# EAGLE board Main (EAGLE 8.4.1)
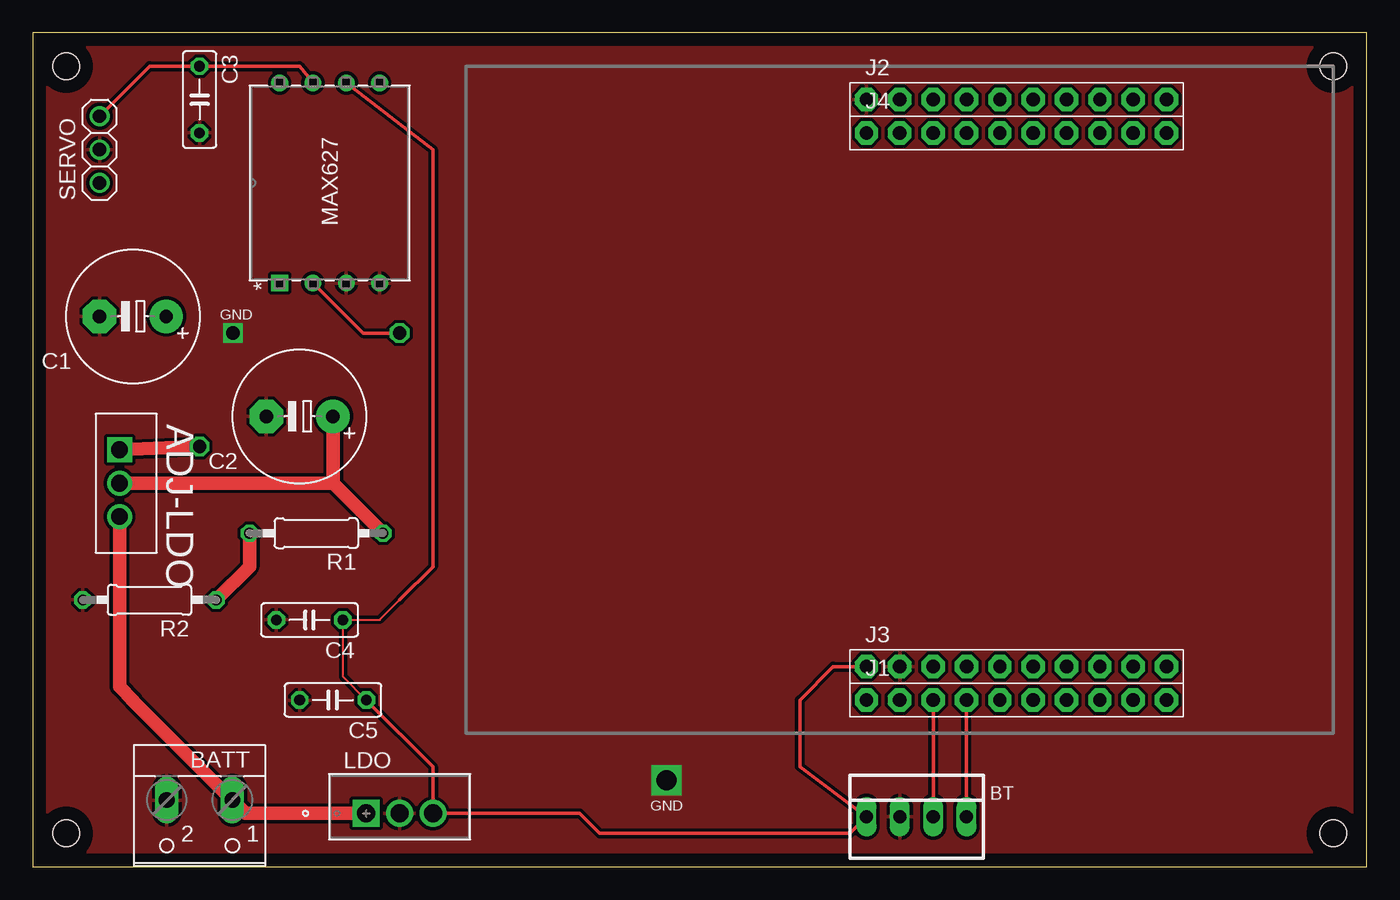
[diagram p0: board, top side]
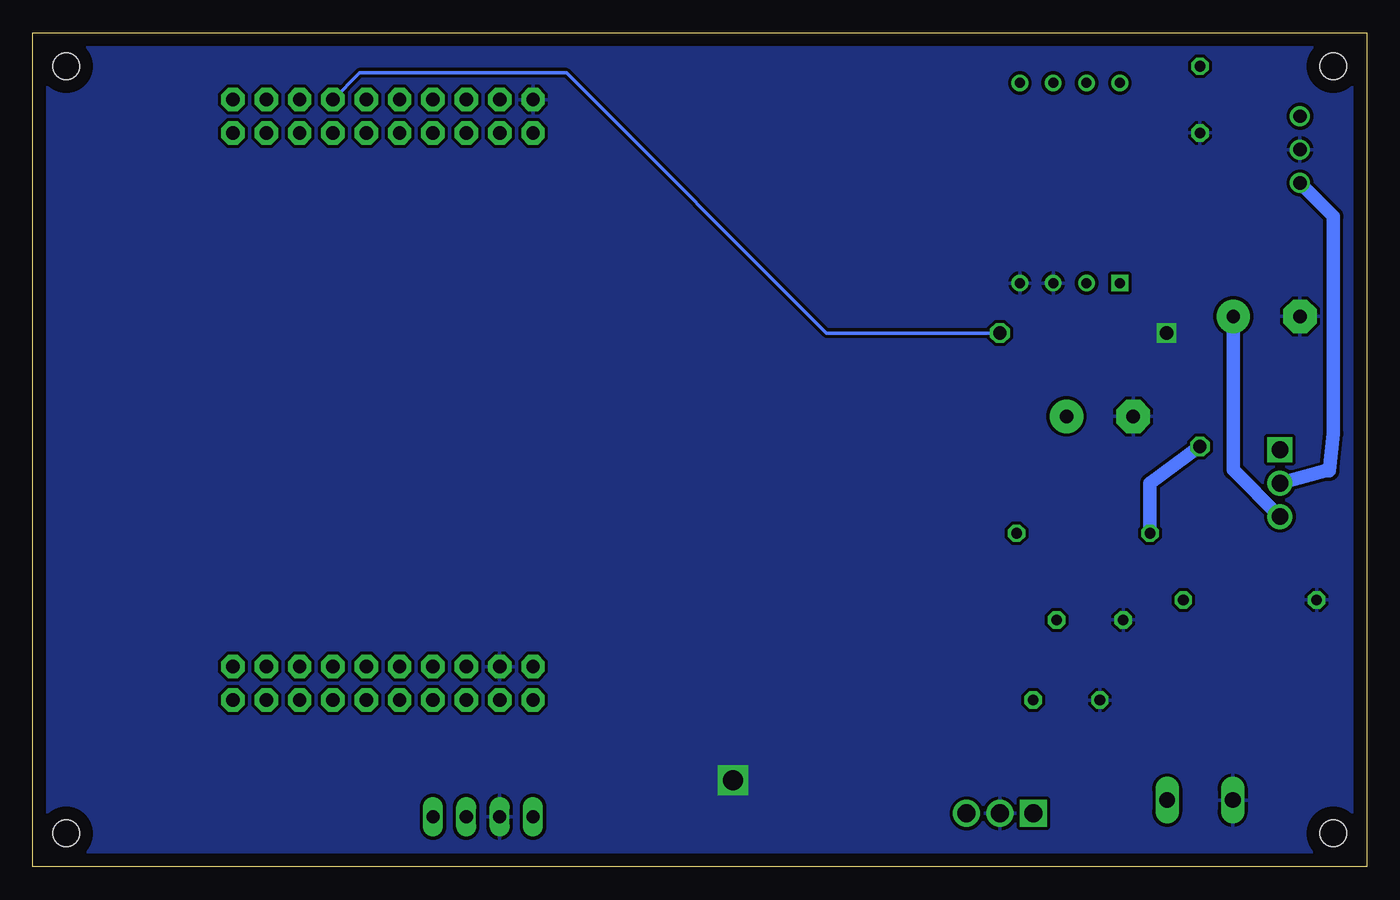
[diagram p1: board, bottom side, seen from below]

Size 101.6 x 63.5 mm. Coordinates in mm from the lower left corner, seen from the top.
Outline: 0,0 101.6,0 101.6,63.5 0,63.5 0,0
Copper layers (1*16): Top 0.035mm / dielectric 1.5mm / Bottom 0.035mm
Design rules "default *": minimum track width 6mil, minimum drill 0.35mm, track to track 10mil, track to pad 10mil, pad to pad 10mil, via to via 10mil, smd to smd 6mil, copper to edge 40mil, drill to drill 6mil, minimum pad ring 10mil, minimum via ring 8mil, stop-mask expansion 4mil, vias tented up to drill 0mil, thermal gap 10mil
Holes 2.03 mm at 2.54,60.96 2.54,2.54 99.06,2.54 99.06,60.96

## Footprints (pad centres in the part's own frame; a part is rotated, then mirrored left to right if it is on the bottom)
TO254P470X1016X2222-3P = drill 1.27 square: 1 -5.08,-1.016 | drill 1.27: 2 -2.54,-1.016; 3 0,-1.016
W237-102 = drill 1.194 long: 1 -2.5,-1.27; 2 2.5,-1.27
22-23-2041 = drill 1 long: 1 -3.81,0; 2 -1.27,0; 3 1.27,0; 4 3.81,0
E5-10,5 = drill 1.016 pad 2.54: + -2.54,0 | drill 1.016 pad 2.54 octagon: - 2.54,0
C050-025X075 = drill 0.813 octagon: 1 -2.54,0; 2 2.54,0
1X10-BIG = drill 1.016 pad 1.778 octagon: 1 -11.43,0; 2 -8.89,0; 3 -6.35,0; 4 -3.81,0; 5 -1.27,0; 6 1.27,0; 7 3.81,0; 8 6.35,0; 9 8.89,0; 10 11.43,0
T03B = drill 1.372 pad 1.88 square: 1 -5.08,-1.016 | drill 1.372 pad 1.88: 2 -2.54,-1.016; 3 0,-1.016
21-0044B_8 = drill 0.762 pad 1.27 square: 1 -15.24,7.62 | drill 0.762 pad 1.27: 2 -15.24,5.08; 3 -15.24,2.54; 4 -15.24,0; 5 0,0; 6 0,2.54; 7 0,5.08; 8 0,7.62
0207/10 = drill 0.813 octagon: 1 -5.08,0; 2 5.08,0
1X03 = drill 1.016: 1 -2.54,0; 2 0,0; 3 2.54,0

## Placement (x,y rotation side)
ADJ-LDO  LM1086  [TO254P470X1016X2222-3P]  7.62,26.67 270 top
BATT  [W237-102]  12.7,3.81 180 top
BT  [22-23-2041]  67.31,3.81 0 top
C1  10uF  [E5-10,5]  7.62,41.91 180 top
C2  10uF  [E5-10,5]  20.32,34.29 180 top
C3  1000pF  [C050-025X075]  12.7,58.42 270 top
C4  4.7uF  [C050-025X075]  21.08,18.8 180 top
C5  0.1uF  [C050-025X075]  22.86,12.7 180 top
J1  PINHD-1X10  [1X10-BIG]  74.93,12.7 0 top
J2  PINHD-1X10  [1X10-BIG]  74.93,58.42 0 top
J3  PINHD-1X10  [1X10-BIG]  74.93,15.24 0 top
J4  PINHD-1X10  [1X10-BIG]  74.93,55.88 0 top
LDO  LM2940T-5.0/NOPB  [T03B]  30.48,5.08 0 top
MAX627  MAX627CPA  [21-0044B_8]  26.42,59.69 90 top
R1  150  [0207/10]  21.59,25.4 180 top
R2  560  [0207/10]  8.89,20.32 180 top
SERVO  [1X03]  5.08,54.61 90 top

## Library data of the parts
ADJ-LDO = LM1086CT-ADJ_NOPB; AVAILABILITY: Good; DESCRIPTION: Ic, Lm1086ct-Adj/Nopb, 1.5a Posi Tive Low Dropout Reg &lt;Az; MF: Texas Instruments; MP: LM1086CT-ADJ/NOPB; PACKAGE: TO-220 Texas Instruments; PRICE: 1.24 USD
BATT = con-wago-500; MPN: 237-102; OC_FARNELL: unknown; OC_NEWARK: 70K9898
BT = con-molex; MF: MOLEX; MPN: 22-23-2041; OC_FARNELL: 1462920; OC_NEWARK: 38C0355
C1-C5 R1 R2 = rcl
J1-J4 SERVO = adafruit
LDO = lm2940; MANUFACTURER_PART_NUMBER: LM2940T5.0NOPB; VENDOR: Texas Instruments
MAX627 = max627; MANUFACTURER_PART_NUMBER: max627cpa; VENDOR: Maxim Integrated Products

## Nets
5V: BT.1 C4.1 C5.1 J3.1 LDO.3 MAX627.6
6.0V: ADJ-LDO.2 C2.+ R1.1 SERVO.1
7.2V: ADJ-LDO.3 BATT.1 C1.+ LDO.1
GND: BATT.2 BT.2 C1.- C2.- C3.2 C4.2 C5.2 J2.1 J3.2 LDO.2 MAX627.3 MAX627.4 R2.2 SERVO.2
N$1: BT.3 J1.3
N$2: BT.4 J1.4
N$7: ADJ-LDO.1 R1.2 R2.1
PWMIN: J2.7 MAX627.2
PWMOUT: C3.1 MAX627.7 SERVO.3

## Tracks (layer width: path | path; a pad name or v marks a point on that pad's centre or on a via)
5V
  Top 0.152: 27.94,20.32 26.42,18.8 C4.1 23.62,14.48 C5.1
  Top 0.254: MAX627.6 30.48,54.61 30.48,22.86 27.94,20.32 | C5.1 30.48,7.62 LDO.3 41.66,4.06 43.18,2.54 62.23,2.54 BT.1 58.42,7.62 58.42,12.7 60.96,15.24 J3.1
6.0V
  Top 1.016: 22.86,29.21 ADJ-LDO.2 | 22.86,29.21 R1.1 | C2.+ 22.86,29.21
  Bottom 1.016: ADJ-LDO.2 3.14,30.14 2.84,30.14 2.54,32.98 2.54,49.53 SERVO.1
7.2V
  Top 1.016: ADJ-LDO.3 6.6,13.72 7.62,12.7 7.62,12.66 BATT.1 16.22,4.06 LDO.1
  Bottom 1.016: ADJ-LDO.3 10.16,30.23 C1.+
GND  (via drill 1 pad 0.8, 1.52)
  other vias: 48.26,6.6 15.24,40.64
  pour Top: 0,0 101.6,0 101.6,63.5 0,63.5
  pour Bottom: 0,0 0,63.5 101.6,63.5 101.6,0
N$1
  Top 0.254: BT.3 J1.3
N$2
  Top 0.254: BT.4 J1.4
N$7  (via drill 1)
  Top 1.016: R1.2 16.51,22.86 R2.1 | ADJ-LDO.1 v12.7,32
  Bottom 1.016: v12.7,32 16.51,29.21 R1.2
PWMIN  (via drill 1)
  Top 0.254: MAX627.2 25.15,40.64 v27.94,40.64
  Bottom 0.254: v27.94,40.64 41.15,40.64 60.96,60.45 76.71,60.45 J2.7
PWMOUT
  Top 0.254: SERVO.3 8.89,60.96 C3.1 20.32,60.96 MAX627.7

## Text on the board
tNames: GND | GND
tDocu: PWM | GND | 6V | TIVA | + | 5V | GND | TX | RX | GND | IN | GND | OUT